# Altium PCB EECS430SinglePatch.PcbDoc
Units mm, origin at the board's own origin, x right, y up, seen from the top; angles counter-clockwise.
Board outline 70 x 70 mm, 2 copper layers (Top Layer, Bottom Layer), stack 1.611 mm thick; 2 components, 2 nets, 4 pads, 0 vias.
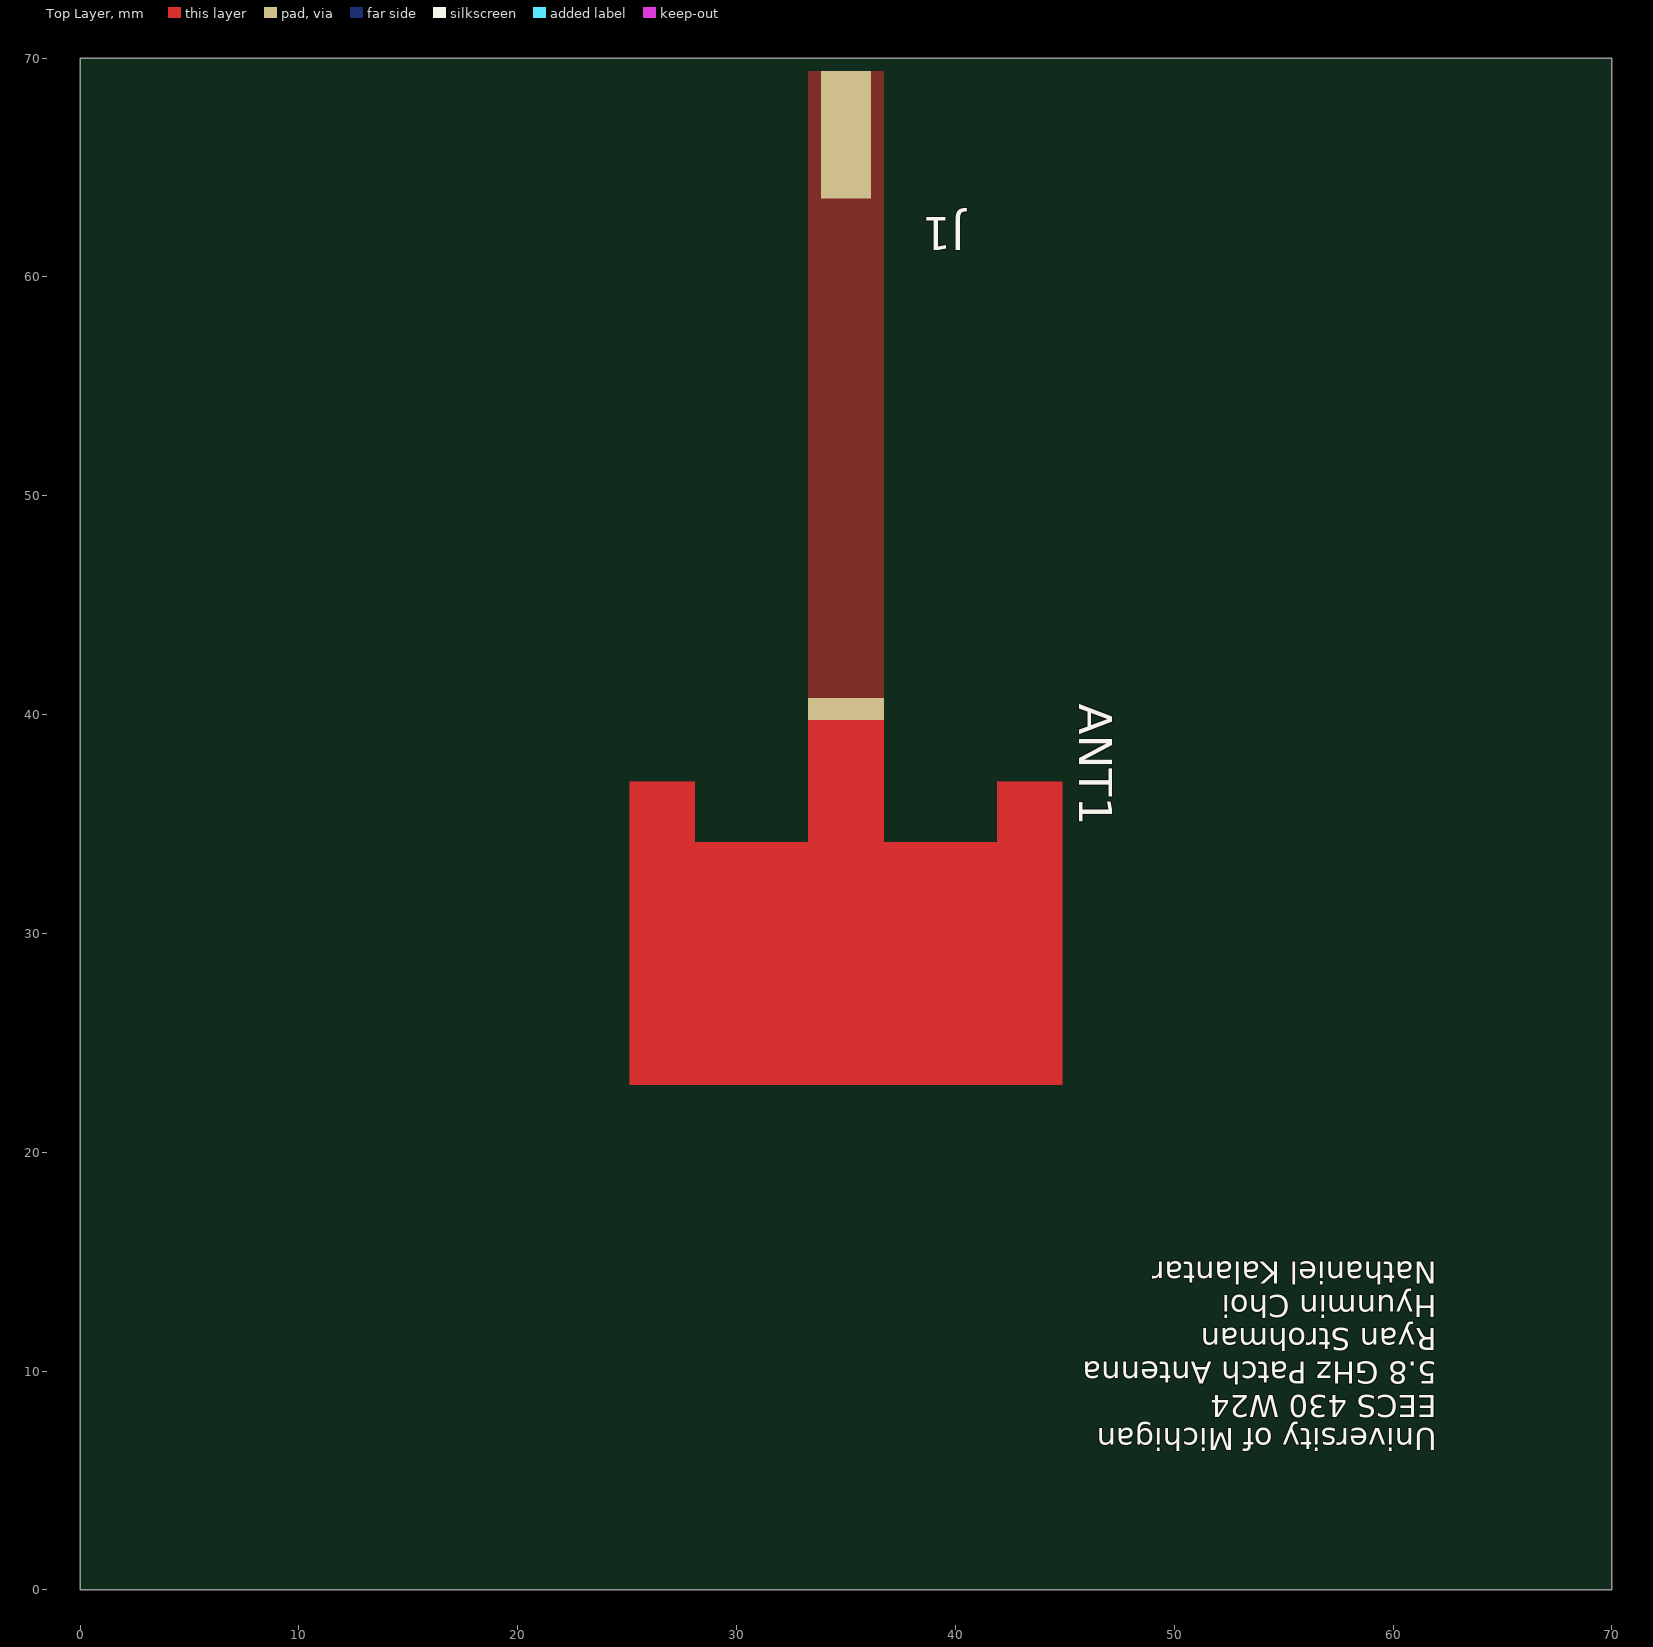
[diagram p0: Top Layer view]
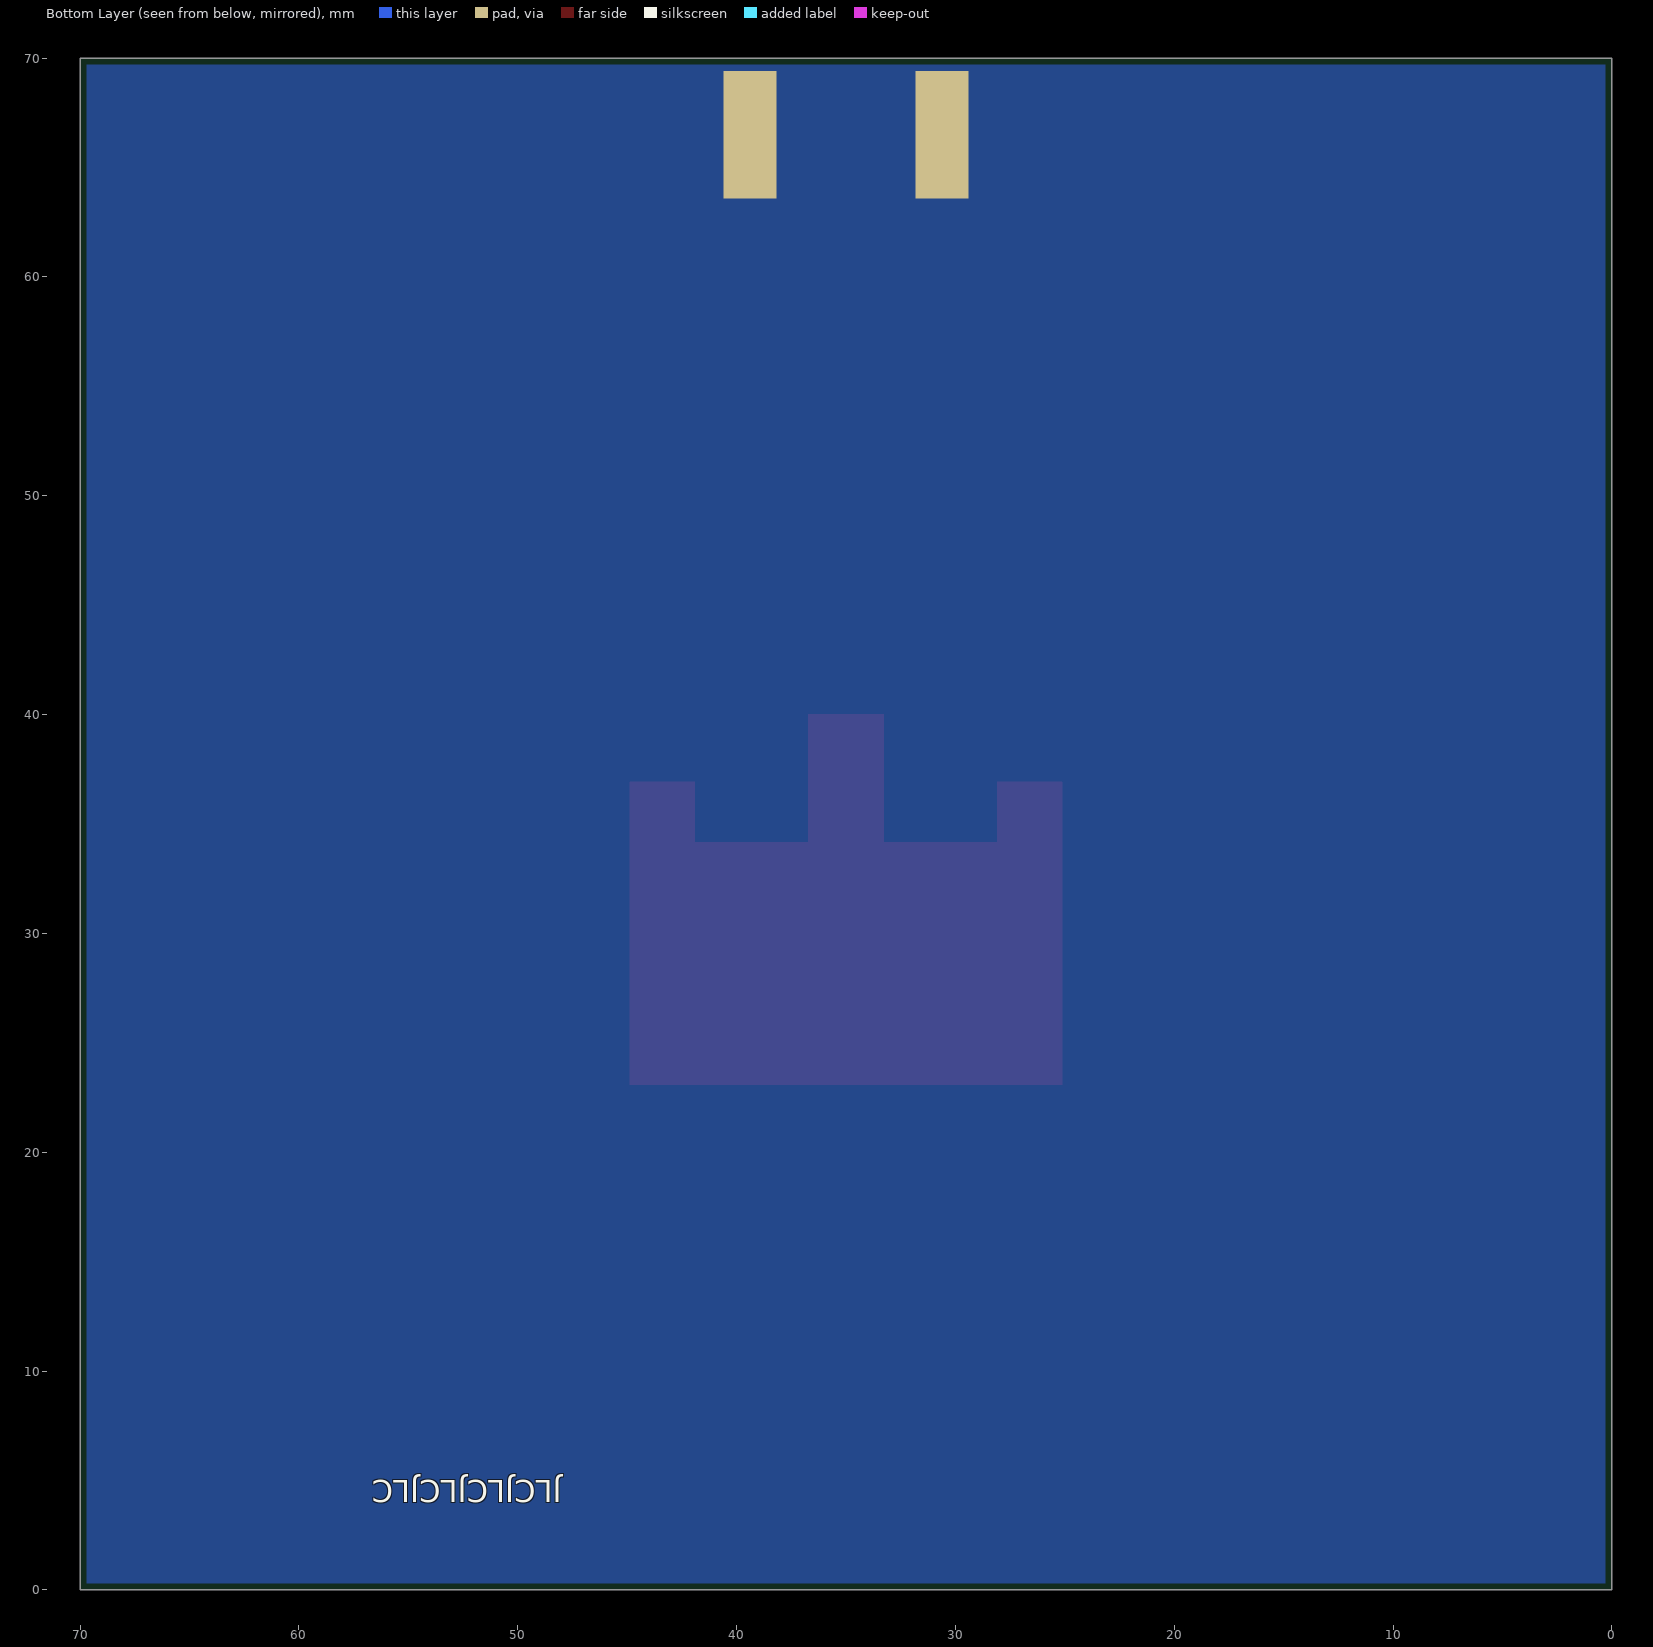
[diagram p1: Bottom Layer view, seen from below]

## Layer stack, top to bottom
Top Solder: solder mask 0.0102, Solder Resist, Dk 3.5
Top Layer: signal copper 0.0356
Dielectric 1: dielectric 1.54, FR-4, Dk 4.8
Bottom Layer: signal copper 0.0356
Bottom Solder: solder mask 0.0102, Solder Resist, Dk 3.5

## Board outline
0,0 70,0 70,70 0,70

## Design rules (kind name [scope] priority, off if disabled: settings)
BoardOutlineClearance [All] p1: gap=0.3 ignorepadtopadclearanceinfootprint=FALSE
Clearance [All] p1: gap=0.254 ignorepadtopadclearanceinfootprint=FALSE except(0: Arc-Hole Track-Hole SMDPad-Hole THPad-Hole Via-Hole Fill-Hole Poly-Hole Region-Hole Text-Hole)
PolygonConnect [All] p1: connectstyle=Direct reliefconductorwidth=0.254 reliefentries=4 polygonreliefangle="90 Angle" airgapwidth=0.254
RoutingVias [All] p1: holewidth=0.711 width=1.27 viastyle="Through Hole" minholewidth=0.711 minwidth=1.27 maxholewidth=0.711 maxwidth=1.27
SolderMaskExpansion [All] p1: expansion=0.102 istentingtop=FALSE
Width [All] p1: maxlimit=0.254 minlimit=0.254 preferedwidth=0.254
30 further rules are at their usual default settings.

## Components (designator, comment, footprint, x,y, rotation, side; value= is the part's Value field where it differs from the comment)
ANT1 "SinglePatch" SinglePatch 35,30 r270 top
J1 "0732511153" 0732511153_2Layer 35,66.5 r270 top

## Footprints (in the part's own frame and the unit in brackets; to place one, negate y for a bottom-side part, rotate by r counter-clockwise, add the part's x,y. Pads: shape width x height; smd on the part's side, far side on the other; paste and mask are expansions set on the pad)
0732511153_2Layer [mil] "SMA Connector Jack, Female Socket 50 Ohms Board Edge, End Launch Solder"
  rect 230x90 smd: 1(0,0)
  rect 230x95 smd far side: 2(0,172.5) 3(0,-172.5)
  body extent -494,-188 68,188, height 172
SinglePatch [mm]
  rect 1x3.457 smd paste-2539.97 mask-10: 1(-10.262,0)
  Top Layer region: -6.935,9.885 -6.935,6.915 -4.159,6.915 -4.159,1.728 -10.009,1.728 -10.009,-1.729 -4.159,-1.729 -4.159,-6.915 -6.935,-6.915 -6.935,-9.885 6.917,-9.885 6.917,9.885

## Part data
J1: "SMA Connector Jack, Female Socket 50 Ohms Board Edge, End Launch Solder"

## Nets (pads, with @x,y where several pads share a name; then routed paths per layer and width w, separated by ;. In a path a pad name is that pad's centre, name@x,y a point inside that pad or via, vN(x,y) a via of type N, cw(c..) or ccw(c..) an arc to the next point about the centre after c; other vN are vias at no path point)
GND: J1.2 J1.3
NetANT1_1: ANT1.1 J1.1

## Polygon pours and split planes (outlines as drawn)
NetANT1_1 on Top Layer "NONET_L-01_P-001" (solid, pour order 0): 33.272,40.205 33.272,69.4 36.729,69.4 36.729,40.205
GND on Bottom Layer "NONET_L-01_P-001" (solid, pour order 1): 0,70 70,70 70,0 0,0

## Silkscreen, mask and mechanical layers (free items; w line width, h text height)
Top Overlay:
  text "University of Michigan / EECS 430 W24 / 5.8 GHz Patch Antenna / Ryan Strohman / Hyunmin Choi / Nathaniel Kalantar" at 62,15 h1.02 r180
Bottom Overlay:
  text "JLCJLCJLCJLC" at 48,5 h1.02 r180
Mechanical 1:
  the board outline again, w0.254